# Altium PCB PCB_Layout_V2.PcbDoc
Units mil, origin at the board's own origin, x right, y up, seen from the top; angles counter-clockwise.
Board outline 6000 x 4000 mil, 2 copper layers (Top Layer, Bottom Layer); 27 components, 16 nets, 339 pads, 0 vias.
Unrouted connection lines stored in the file: 26.
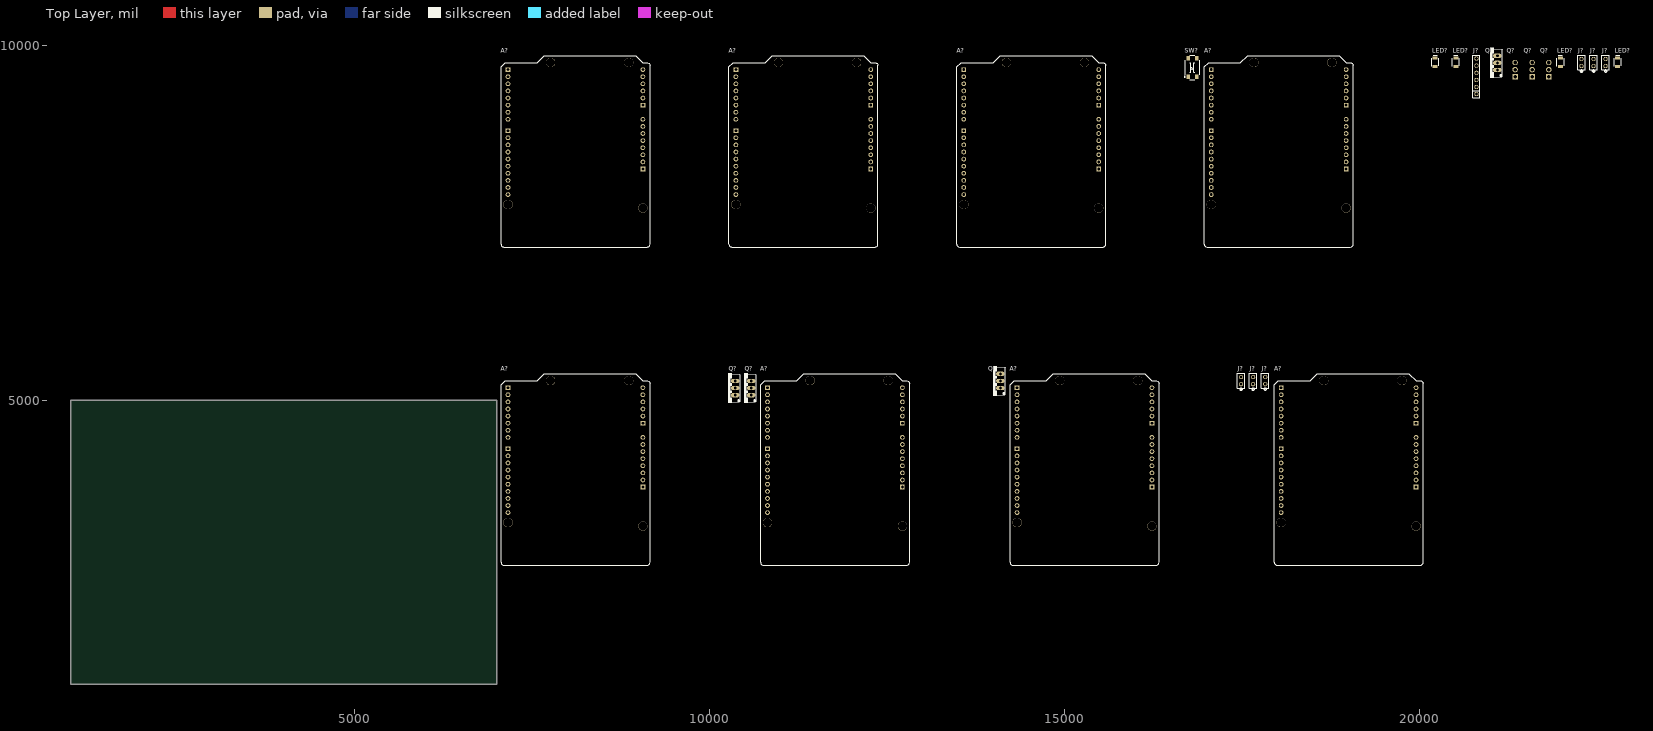
[diagram p0: Top Layer view]
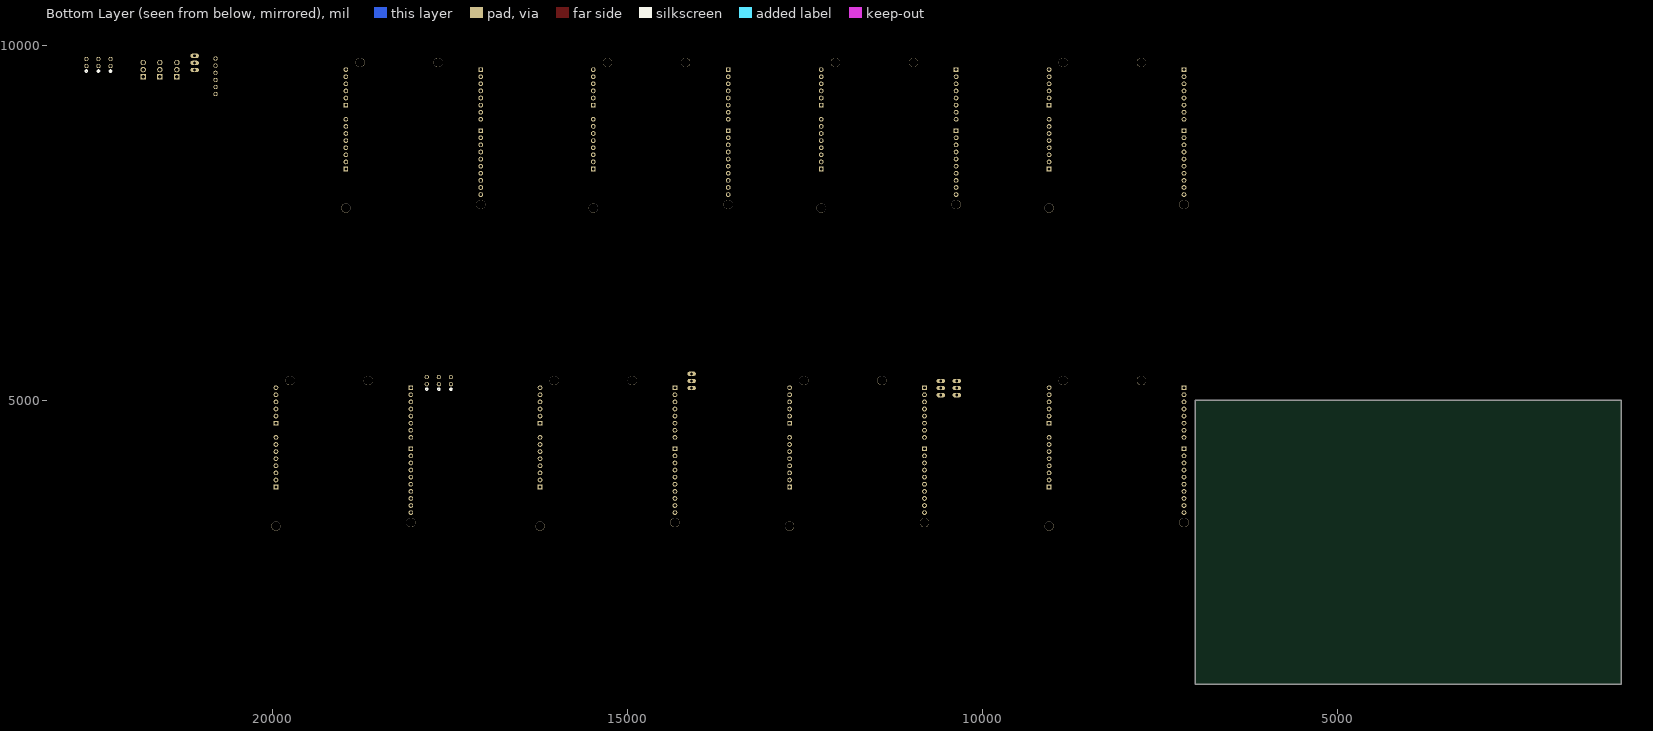
[diagram p1: Bottom Layer view, seen from below]

## Layer stack, top to bottom
Top Solder: solder mask 0.4, Solder Resist, Dk 3.5
Top Layer: signal copper 1.4
Dielectric 1: dielectric 12.6, FR-4, Dk 4.8
Bottom Layer: signal copper 1.4
Bottom Solder: solder mask 0.4, Solder Resist, Dk 3.5

## Board outline
1000,1000 7000,1000 7000,5000 1000,5000

## Design rules (kind name [scope] priority, off if disabled: settings)
Clearance [All] p1: gap=10 ignorepadtopadclearanceinfootprint=FALSE except(0: Arc-Hole Track-Hole SMDPad-Hole THPad-Hole Via-Hole Fill-Hole Poly-Hole Region-Hole Text-Hole)
PolygonConnect [All] p1: connectstyle=Relief reliefconductorwidth=10 reliefentries=4 polygonreliefangle="90 Angle" airgapwidth=10
RoutingVias [All] p1: holewidth=28 width=50 viastyle="Through Hole" minholewidth=28 minwidth=50 maxholewidth=28 maxwidth=50
SolderMaskExpansion [All] p1: expansion=4 istentingtop=FALSE
Width [All] p1: maxlimit=10 minlimit=10 preferedwidth=10
30 further rules are at their usual default settings.

## Classes and differential pairs
component class Water_SmartSchematicV1: A? J? LED? Q Q? SW?
component class Water_Smart_SchematicV2: A? J? Q Q?

## Components (designator, comment, footprint, x,y, rotation, side; value= is the part's Value field where it differs from the comment)
A? "A000066" ARDUINO_A000066 16330,2675 r90 top
A? "A000066" ARDUINO_A000066 9160,2675 r90 top
A? "A000066" ARDUINO_A000066 12815,2675 r90 top
A? "A000066" ARDUINO_A000066 20050,2675 r90 top
A? "A000066" ARDUINO_A000066 9160,7155 r90 top
A? "A000066" ARDUINO_A000066 19065,7155 r90 top
A? "A000066" ARDUINO_A000066 15580,7155 r90 top
A? "A000066" ARDUINO_A000066 12370,7155 r90 top
J? "SSQ-102-02-G-S" JF-2_1X2_TU_SSQ 17825,5275 r90 top
J? "SSQ-102-02-G-S" JF-2_1X2_TU_SSQ 17485,5275 r90 top
J? "SSQ-102-02-G-S" JF-2_1X2_TU_SSQ 17655,5275 r90 top
J? "MALE" 6_PIN_100MIL-Male 20800,9310 r90 top
J? "SSQ-102-02-G-S" JF-2_1X2_TU_SSQ 22280,9755 r90 top
J? "SSQ-102-02-G-S" JF-2_1X2_TU_SSQ 22620,9755 r90 top
J? "SSQ-102-02-G-S" JF-2_1X2_TU_SSQ 22450,9755 r90 top
LED? "Green" LED_1206 20510,9760 r90 top
LED? "Blue" LED_1206 21985,9760 r90 top
LED? "Red" LED_1206 20220,9760 r90 top
LED? "White" LED_1206 22790,9760 r90 top
Q "FQP30N06L" TO220V 13995,5270 r90 top
Q "FQP30N06L" TO220V 20995,9750 r90 top
Q? "FQP30N06L" TO220V 10485,5170 r90 top
Q? "FQP30N06L" TO220V 10260,5170 r90 top
Q? "IRL520NPBF" TO254P469X1042X1967-3P 21820,9555 r90 top
Q? "IRL520NPBF" TO254P469X1042X1967-3P 21345,9555 r90 top
Q? "IRL520NPBF" TO254P469X1042X1967-3P 21585,9555 r90 top
SW? "TL3305AF160QG" Switch_JLC 16800,9685 r90 top

## Footprints (in the part's own frame and the unit in brackets; to place one, negate y for a bottom-side part, rotate by r counter-clockwise, add the part's x,y. Pads: shape width x height; smd on the part's side, far side on the other; paste and mask are expansions set on the pad)
6_PIN_100MIL-Male [mil]
  round 60 hole 43.31: 1(0,0) 2(100,0) 3(200,0) 4(300,0) 5(400,0) 6(500,0)
  silkscreen extent -50,-50 550,50, body extent -53,-50 547,50, height 337
ARDUINO_A000066 [mil]
  round 66 hole 40: 3V3(1400,100) 5V(1500,100) A1(2100,100) A2(2200,100) A3(2300,100) A4(2400,100) A4(SDA)(840,2000) A5(2500,100) A5(SCL)(740,2000) AREF(940,2000) D1(2400,2000) D2(2300,2000) D3(2200,2000) D4(2100,2000) D5(2000,2000) D6(1900,2000) D7(1800,2000) D9(1540,2000) D10(1440,2000) D11(1340,2000) D12(1240,2000) D13(1140,2000) GND_1(1700,100) GND_2(1600,100) GND_3(1040,2000) IOREF(1200,100) RST(1300,100) VIN(1800,100)
  rect 66x66 / inner round 66 / far side rect 66x66 hole 40: A0(2000,100) D0(2500,2000) D8(1640,2000) P1(1100,100)
  round 129.92 hole 129.92 unplated: ""(550,100) ""(600,2000) ""(2600,300) ""(2600,1400)
  silkscreen extent 0,0 2698,2098, body extent -1606,-1050 1350,1050, height 467
JF-2_1X2_TU_SSQ [mil]
  round 60 hole 40: 1(-50,0) 2(50,0)
  silkscreen extent -135,-50 105,55, body extent -99,-50 99,50, height 340
LED_1206 [mil]
  rect 44x71 smd: 1(-59,0) 2(59,0)
  silkscreen extent -54,-51 99,51, body extent -63,-31 63,31, height 28
Switch_JLC [mm]
  rect 1.5x1.2 smd: 1(-3.3,1.5) 2(3.3,1.5) 3(-3.3,-1.5) 4(3.3,-1.5)
  silkscreen extent -4.44,-2.54 4.45,3, body extent -3.8,-2.29 3.7,2.21, height 3.7
TO220V [mil]
  oval 60x120 hole 40: 1(-100,-100) 2(0,-100) 3(100,-100)
  silkscreen extent -210,-170 210,0
TO254P469X1042X1967-3P [mm]
  rect 1.92x1.92 hole 1.28: 1(0,0)
  round 1.92 hole 1.28: 2(2.54,0) 3(5.08,0)
  body extent -2.67,-1.5 7.75,3.19, height 18.84

## Part data
A? A? A? A? A? A? A? A?: "Microcontroller board based on the ATmega328P.", Package="Non-Standard Arduino", Availability="Not in stock", Check_prices=https://www.snapeda.com/parts/Arduino%20Uno%20Rev3/Arduino/view-part/?ref=eda, MF=Arduino, MP="Arduino Uno Rev3", Price=None, SnapEDA_Link=https://www.snapeda.com/parts/Arduino%20Uno%20Rev3/Arduino/view-part/?ref=snap
J? J? J? J? J? J?: library part JF_2_PIN_FEMALE, "2.54mm Straight 1x2P 2 1 Straight,P=2.54mm  Female Headers ROHSon Available", LCSC PART#=C49661, MFR PART #=C49661, MFR PN=SSQ-102-02-G-S
J?: library part JM_6_PIN_MALE, "Male header- 6 pin 1 row- through Hole", LCSC PART#=C37208, Datasheet=https://datasheet.lcsc.com/szlcsc/1810312320_BOOMELE-Boom-Precision-Elec-C37208_C37208.pdf, Type=Extended
LED?: library part LED_GREEN_1206, "Green 513~528nm 1206 Light Emitting Diodes (LED) RoHS", LCSC PART#=C434439, MFR PART #=SZYY1206G, Datasheet=https://datasheet.lcsc.com/lcsc/2006301532_Yongyu-Photoelectric-SZYY1206G_C434439.pdf, Type=Extended
LED?: library part LED_BLUE_1206, "blue 1206  Light Emitting Diodes (LED) ROHS", LCSC PART#=C130717, MFR PART #=NCD1206B1, Datasheet=https://datasheet.lcsc.com/lcsc/2008201033_Foshan-NationStar-Optoelectronics-NCD1206B1_C130717.pdf, Type=Extended
LED?: library part LED_RED_1206, "Red 621~631nm 1206 Light Emitting Diodes (LED) RoHS", LCSC PART#=C93133, MFR PART #=15-21/R6C-FQ1R1B/2T, Datasheet=https://datasheet.lcsc.com/szlcsc/1811151241_Everlight-Elec-15-21-R6C-FQ1R1B-2T_C93133.pdf, Type=Extended
LED?: library part LED_WHITE_1206, "White light 1206  Light Emitting Diodes (LED) ROHS", LCSC PART#=C130718, MFR PART #=NCD1206W1, Datasheet=https://datasheet.lcsc.com/lcsc/2008201033_Foshan-NationStar-Optoelectronics-NCD1206W1_C130718.pdf, Type=Extended
Q Q Q? Q?: "N-Channel 60V 32A _Tc_ 79W _Tc_ Through Hole TO-220-3", Package="TO-220 ON Semiconductor", Availability=Unavailable, MF="ON Semiconductor", MP=FQP30N06L, Price=None, SnapEDA_Link=https://www.snapeda.com/parts/FQP30N06L/ON%20Semiconductor/view-part/1413126/?ref=snap
Q? Q? Q?: library part Q_Nch_MOSFET_PTH, "MOSFET (N-Channel)  IRL520NPBF", Manufacturer_Name=Infineon, Mouser Part Number=942-IRL520NPBF, Arrow Part Number=IRL520NPBF, Arrow Price/Stock=https://www.arrow.com/en/products/irl520npbf/infineon-technologies-ag?region=nac, Datasheet Link=https://www.infineon.com/dgdl/irl520npbf.pdf?fileId=5546d462533600a40153565f9b62255b, Height=4.69mm, Manufacturer_Part_Number=IRL520NPBF, Mouser Price/Stock=https://www.mouser.co.uk/ProductDetail/Infineon-IR/IRL520NPBF?qs=9%252BKlkBgLFf3eZ5ppEpIaKQ%3D%3D
SW?: library part SW_Push_Button_JLC, "Tactile Switch SPST-NO Top Actuated Surface Mount", LCSC PART#=C2837550, MFR PART #=KH-4.5X4.5X4.3H-STM, Datasheet=https://datasheet.lcsc.com/lcsc/2106081532_Shenzhen-Kinghelm-Elec-KH-4.5X4.5X4.3H-STM_C2837550.pdf, Type=Extended

## Nets (pads, with @x,y where several pads share a name; then routed paths per layer and width w, separated by ;. In a path a pad name is that pad's centre, name@x,y a point inside that pad or via, vN(x,y) a via of type N, cw(c..) or ccw(c..) an arc to the next point about the centre after c; other vN are vias at no path point)
+12: J?.1@22450,9705 J?.1@22620,9705
GND: LED?.2 Q?.3@21345,9755 Q?.3@21585,9755 Q?.3@21820,9755
NetA?_5V: A?.5V@16230,4175
NetA?_A0: A?.A0@9060,4675
NetA?_A1: A?.A1@9060,4775
NetA?_D8: A?.D8@10815,4315 Q.1@14095,5170
NetA?_D9: A?.D9@10815,4215 Q?.1@10585,5070
NetA?_D10: A?.D10@10815,4115 Q?.1@10360,5070
NetA?_GND_1: A?.GND_1@16230,4375 J?.2@17825,5325 Q.3@14095,5370 Q?.3@10360,5270 Q?.3@10585,5270
NetA?_VIN: A?.VIN@16230,4475 J?.1@17485,5225 J?.1@17655,5225 J?.1@17825,5225
NetJ?_1: J?.1@20800,9310 LED?.1@20510,9701 Q?.1@21345,9555
NetJ?_2: J?.2@22280,9805 Q?.2@21345,9655
NetJ?_4: J?.4 Q?.1@21585,9555
NetJ?_5: J?.5 LED?.1@22790,9701 Q?.1@21820,9555
NetJ?_6: J?.6 LED?.1@20220,9701 SW?.3
VCC: J?.1@22280,9705 SW?.1
pads on no net: A?. A?.3V3 A?.5V@9060,4175 A?.5V@9060,8655 A?.5V@12270,8655 A?.5V@12715,4175 A?.5V@15480,8655 A?.5V@18965,8655 A?.5V@19950,4175 A?.A0@9060,9155 A?.A0@12270,9155 A?.A0@12715,4675 A?.A0@15480,9155 A?.A0@16230,4675 A?.A0@18965,9155 A?.A0@19950,4675 A?.A1@9060,9255 A?.A1@12270,9255 A?.A1@12715,4775 A?.A1@15480,9255 A?.A1@16230,4775 A?.A1@18965,9255 A?.A1@19950,4775 A?.A2 A?.A3 A?.A4 A?.A4(SDA) A?.A5 A?.A5(SCL) A?.AREF A?.D0 A?.D1 A?.D2 A?.D3 A?.D4 A?.D5 A?.D6 A?.D7 A?.D8@7160,4315 A?.D8@7160,8795 A?.D8@10370,8795 A?.D8@13580,8795 A?.D8@14330,4315 A?.D8@17065,8795 A?.D8@18050,4315 A?.D9@7160,4215 A?.D9@7160,8695 A?.D9@10370,8695 A?.D9@13580,8695 A?.D9@14330,4215 A?.D9@17065,8695 A?.D9@18050,4215 A?.D10@7160,4115 A?.D10@7160,8595 A?.D10@10370,8595 A?.D10@13580,8595 A?.D10@14330,4115 A?.D10@17065,8595 A?.D10@18050,4115 A?.D11 A?.D12 A?.D13 A?.GND_1@9060,4375 A?.GND_1@9060,8855 A?.GND_1@12270,8855 A?.GND_1@12715,4375 A?.GND_1@15480,8855 A?.GND_1@18965,8855 A?.GND_1@19950,4375 A?.GND_2 A?.GND_3 A?.IOREF A?.P1 A?.RST A?.VIN@9060,4475 A?.VIN@9060,8955 A?.VIN@12270,8955 A?.VIN@12715,4475 A?.VIN@15480,8955 A?.VIN@18965,8955 A?.VIN@19950,4475 J?.2@17485,5325 J?.2@17655,5325 J?.2@20800,9410 J?.2@22450,9805 J?.2@22620,9805 J?.3 LED?.1@21985,9701 Q.1@21095,9650 Q.2 Q.3@21095,9850 Q?.2@10360,5170 Q?.2@10585,5170 Q?.2@21585,9655 Q?.2@21820,9655 SW?.2 SW?.4

## Text inside footprints (layer, text, board x,y; h text height)
Q: Mechanical 13 "1" at 21120.25,9624.75 h50.1 r90; Mechanical 13 "2" at 21120.17,9724.97 h50.07 r90; Mechanical 13 "3" at 21120.1,9825.06 h50.04 r90
Q: Mechanical 13 "1" at 14120.25,5144.75 h50.1 r90; Mechanical 13 "2" at 14120.17,5244.97 h50.07 r90; Mechanical 13 "3" at 14120.1,5345.06 h50.04 r90
Q?: Mechanical 13 "1" at 10610.25,5044.75 h50.1 r90; Mechanical 13 "2" at 10610.17,5144.97 h50.07 r90; Mechanical 13 "3" at 10610.1,5245.06 h50.04 r90
Q?: Mechanical 13 "1" at 10385.25,5044.75 h50.1 r90; Mechanical 13 "2" at 10385.17,5144.97 h50.07 r90; Mechanical 13 "3" at 10385.1,5245.06 h50.04 r90